# EAGLE board STorM32 NT breakout v10 (EAGLE 6.5.0)
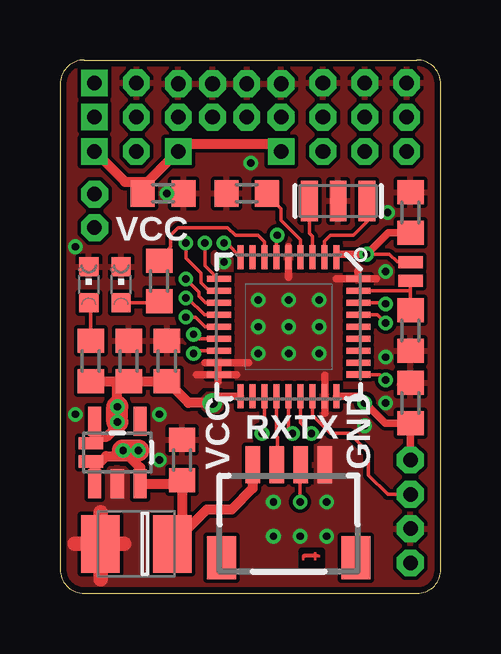
[diagram p0: board, top side]
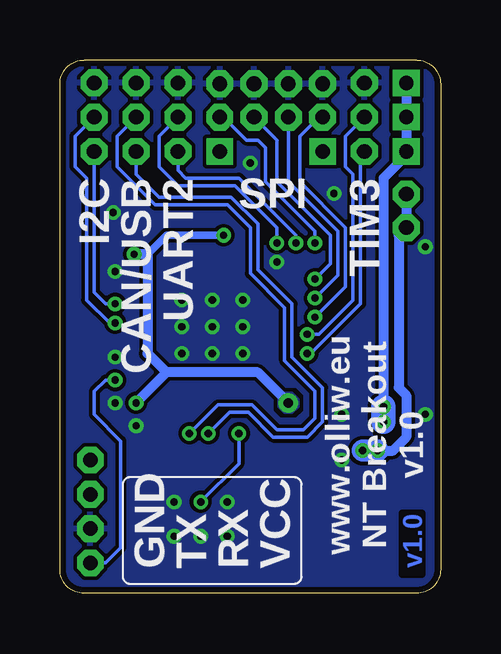
[diagram p1: board, bottom side, seen from below]

Size 15.88 x 22.23 mm. Coordinates in mm from the lower left corner, seen from the top.
Outline: 1,22.23 14.88,22.23 arc-90 15.88,21.23 15.88,1 arc-90 14.88,0 1,0 arc-90 0,1 0,21.23 arc-90 1,22.23
Copper layers (1*16): Top 0.035mm / dielectric 1.5mm / Bottom 0.035mm
Design rules "Fusion_eagle_rule_v1.1-shapes-supply-changed": minimum track width 6mil, minimum drill 12mil, track to track 6mil, track to pad 6mil, pad to pad 6mil, via to via 6mil, smd to smd 0mil, copper to edge 10mil, drill to drill 10mil, minimum pad ring 10mil, minimum via ring 6mil, stop-mask expansion 2mil, vias tented up to drill 100mil, thermal gap 6mil

## Footprints (pad centres in the part's own frame; a part is rotated, then mirrored left to right if it is on the bottom)
SMC_B = smd 1.6 x 2.4: + -1.5,0; - 1.5,0
C0603 = smd 1 x 1.1: 1 -0.85,0; 2 0.85,0
SOT23-5 = smd 0.55 x 1.2: 1 -0.95,-1.3; 2 0,-1.3; 3 0.95,-1.3; 4 0.95,1.3; 5 -0.95,1.3
4X1_1P27_OCT_BILEX = drill 0.61 pad 1.118 octagon: 1 0,0; 2 0,-1.429; 3 0,-2.857; 4 0,-4.286
1X1_1P27_QUAD_1.0X0.6 = drill 0.6 pad 1.016 square: 1 0,0
2X1_1P27_OCT_BILEX = drill 0.61 pad 1.118 octagon: 1 0,0; 2 0,-1.397
3X1_1P27_OCT_BILEX = drill 0.61 pad 1.118 octagon: 1 0,0; 2 0,-1.429; 3 0,-2.857
CHIPLED_0603 = smd 0.8 x 0.8: A 0,-0.75; C 0,0.75
SM04B-SRSS-TB = smd 0.6 x 1.55: 1 -1.5,2.975; 2 -0.5,2.975; 3 0.5,2.975; 4 1.5,2.975 | smd 1.2 x 1.8: FIT@1 -2.8,-0.9; FIT@2 2.8,-0.9
R0603 = smd 1 x 1.1: 1 -0.85,0; 2 0.85,0
SJ_2S-NO = smd 0.508 x 1.016: 1 -0.381,0; 2 0.381,0
VFQFPN36 = smd 1 x 0.25: 1 -2.9,2; 2 -2.9,1.5; 3 -2.9,1; 4 -2.9,0.5; 5 -2.9,0; 6 -2.9,-0.5; 7 -2.9,-1; 8 -2.9,-1.5; 9 -2.9,-2; 19 2.9,-2; 20 2.9,-1.5; 21 2.9,-1; 22 2.9,-0.5; 23 2.9,0; 24 2.9,0.5; 25 2.9,1; 26 2.9,1.5; 27 2.9,2 | smd 0.25 x 1: 10 -2,-2.9; 11 -1.5,-2.9; 12 -1,-2.9; 13 -0.5,-2.9; 14 0,-2.9; 15 0.5,-2.9; 16 1,-2.9; 17 1.5,-2.9; 18 2,-2.9; 29 1.5,2.9; 30 1,2.9; 31 0.5,2.9; 32 0,2.9; 33 -0.5,2.9; 34 -1,2.9; 35 -1.5,2.9; 36 -2,2.9 | smd 0.27 x 1: 28 2,2.9
RESONATOR-SMD = smd 0.7 x 1.7: 1 -1.2,0; 2 0,0; 3 1.2,0

## Placement (x,y rotation side)
C1  10u/6.3V  [SMC_B]  3.17,2.06 180 top
C2  100n  [C0603]  5.08,5.56 90 top
C3  100n  [C0603]  4.29,16.67 0 top
C7  1u  [C0603]  2.86,9.68 90 top
C8  100n  [C0603]  7.78,16.67 180 top
C9  100n  [C0603]  14.61,7.94 90 top
C10  100n  [C0603]  4.45,9.68 90 top
C11  100n  [C0603]  14.61,15.88 90 top
IC2  [SOT23-5]  2.38,5.87 0 top
JP1  SPI  [4X1_1P27_OCT_BILEX]  4.92,21.23 90 top
JP2  SWD  [4X1_1P27_OCT_BILEX]  14.61,5.56 0 top
JP3  SPI  [4X1_1P27_OCT_BILEX]  4.92,19.84 90 top
JP4  3V  [1X1_1P27_QUAD_1.0X0.6]  4.92,18.41 0 top
JP5  3V  [1X1_1P27_QUAD_1.0X0.6]  9.21,18.41 0 top
JP6  3V  [1X1_1P27_QUAD_1.0X0.6]  1.43,18.41 0 top
JP7  VCC  [2X1_1P27_OCT_BILEX]  1.43,15.24 180 top
JP8  3V  [1X1_1P27_QUAD_1.0X0.6]  1.43,19.84 0 top
JP9  UART2  [3X1_1P27_OCT_BILEX]  10.95,18.41 180 top
JP10  CAN/USB  [3X1_1P27_OCT_BILEX]  12.7,18.41 180 top
JP11  I2C  [3X1_1P27_OCT_BILEX]  14.45,18.41 180 top
JP12  TIM  [3X1_1P27_OCT_BILEX]  3.17,18.41 180 top
JP13  3V  [1X1_1P27_QUAD_1.0X0.6]  1.43,21.27 0 top
LED1  red  [CHIPLED_0603]  1.19,12.86 0 top
LED2  green  [CHIPLED_0603]  2.54,12.86 0 top
NTX  NTX  [SM04B-SRSS-TB]  9.53,2.38 0 top
R1  4.7k  [R0603]  1.27,9.68 90 top
R6  2.2k  [R0603]  4.13,13.02 270 top
R7  10k  [R0603]  14.61,10.95 90 top
SJ1  POWER  [SJ_2S-NO]  1.27,5.87 90 top
SJ2  BOOT0  [SJ_2S-NO]  14.61,13.41 270 top
U1  STM32F10XTXU6  [VFQFPN36]  9.53,11.11 270 top
Y1  RESONATORSMD  [RESONATOR-SMD]  11.59,16.35 180 top

## Library data of the parts
C1-C3 C7-C11 R1 R6 R7 = rcl
IC2 SJ1 SJ2 Y1 = # SparkFun2
JP1-JP13 = # stdlib
LED1 LED2 = led
NTX = con-jst2
U1 = # stm32

## Nets
3.3V: C3.1 C7.1 C9.1 C10.1 C11.1 IC2.5 JP2.1 JP4.1 JP5.1 JP6.1 JP8.1 JP13.1 R1.1 SJ1.2 SJ2.1 U1.1 U1.6 U1.19 U1.27
5V: C1.+ C2.1 IC2.1 IC2.3 JP7.1 JP7.2 NTX.1 SJ1.1
CANRX: JP10.1 U1.23
CANTX: JP10.2 U1.24
CS: JP3.4 U1.11
GND: C1.- C2.2 C3.2 C7.2 C8.2 C9.2 C10.2 C11.2 IC2.2 JP1.1 JP1.2 JP1.3 JP1.4 JP2.3 JP9.3 JP10.3 JP11.3 JP12.3 LED1.C LED2.C NTX.4 R7.1 U1.5 U1.17 U1.18 U1.26 U1.36 Y1.2
LED: R6.1 U1.7
N$1: C8.1 U1.4
N$2: LED2.A R6.2
N$3: R7.2 SJ2.2 U1.35
N$5: U1.2 Y1.1
N$6: U1.3 Y1.3
N$9: LED1.A R1.2
RX: NTX.2 U1.22
RX2: JP9.1 U1.10
SCK: JP3.3 U1.12
SCL: JP11.2 U1.33
SDA: JP11.1 U1.34
SDI: JP3.1 U1.14
SDO: JP3.2 U1.13
SWCLK: JP2.4 U1.28
SWDIO: JP2.2 U1.25
T11: U1.20
T33: JP12.2 U1.15
T34: JP12.1 U1.16
TX: NTX.3 U1.21
TX2: JP9.2 U1.9

## Tracks (layer width: path | path; a pad name or v marks a point on that pad's centre or on a via)
3.3V  (via drill 0.3, 0.4 pad 0.81)
  Top 0.152: 1.59,6.58 1.43,6.51 IC2.5 1.46,7.14 | 11.57,13.97 U1.1 11.53,14.13 | 14.47,15.03 C11.1 | U1.6 9.03,14.9 v9.05,14.92 | SJ2.1 14.59,13.81 14.05,13.81 13.73,14.13 v12.78,14.13 | C3.1 3.49,16.73 3.49,17.14
  Top 0.305: U1.27 12.43,8.21 v12.7,7.94 13.55,7.09 C9.1 JP2.1 | U1.19 6.62,8.21 v6.35,7.94 | 11.53,14.13 v12.78,14.13 13.68,15.03 C11.1
  Top 0.406: 1.59,6.58 SJ1.2 | R1.1 2.38,8.83 | 1.43,6.51 1.91,6.51 2.38,6.99 v2.38,7.14 | v2.38,7.78 2.38,8.83 | v6.35,7.94 5.34,7.94 C10.1 C7.1 2.38,8.83 | JP5.1 8.89,18.73 5.24,18.73 JP4.1 3.65,17.14 3.49,17.14 2.7,17.14 JP6.1
  Top 0.914: v2.38,7.14 v2.38,7.78
  Bottom 0.305: 12.22,14.13 11.43,14.92 v9.05,14.92
  Bottom 0.406: v6.35,7.94 7.62,9.21 11.43,9.21 | v12.78,14.13 12.22,14.13 12.22,10 11.43,9.21 | v2.38,7.78 2.38,17.3 1.43,18.26 JP6.1 JP8.1 JP13.1 | 11.43,9.21 v12.7,7.94
  Bottom 1.016: v2.38,7.14 v2.38,7.78
  pour Top: 5.95,7.7 5.95,8.18 6.11,8.33 6.59,8.33 6.75,8.18 6.75,7.7 6.59,7.54 6.11,7.54
  pour Bottom: 6.19,8.33 6.59,8.33 6.75,8.18 6.75,7.78 6.51,7.54 6.19,7.54 5.95,7.78 5.95,8.1
5V  (via drill 0.3)
  Top 0.152: IC2.3 | SJ1.1 1.5,5.49 1.43,5.24 | 6.1,3.49 5.87,3.33 | 5.08,2.47 C1.+ | 4.95,4.57 C2.1 | 1.91,5.71 2.38,5.71 v2.62,5.95
  Top 0.406: NTX.1 8.03,4.37 7.14,3.49 6.1,3.49 C1.+ | IC2.1 1.43,5.24 1.91,5.71 2.86,5.71 3.33,5.24 IC2.3 | IC2.3 4.95,4.57 | C2.1 5.08,2.47
  Top 0.914: v3.25,5.95 v2.62,5.95
  Bottom 0.406: JP7.2 JP7.1 1.75,14.92 1.75,8.57 1.43,8.26 1.43,6.51 1.98,5.95 v2.62,5.95
  Bottom 0.914: v2.62,5.95 v3.25,5.95
CANRX  (via drill 0.3)
  Top 0.152: U1.23 9.53,6.83 v9.68,6.67
  Bottom 0.152: v9.68,6.67 8.81,7.54 8.02,7.54 6.99,6.51 5.56,6.51 4.92,7.14 4.92,8.57 6.19,9.84 6.19,12.06 7.62,13.49 7.62,15.4 8.73,16.51 11.75,16.51 12.7,17.46 JP10.1
CANTX  (via drill 0.3)
  Top 0.152: U1.24 10.03,7.12 v10.48,6.67
  Bottom 0.152: v10.48,6.67 9.29,7.86 7.86,7.86 6.83,6.83 5.71,6.83 5.24,7.3 5.24,8.41 6.51,9.68 6.51,11.91 7.94,13.34 7.94,15.24 8.89,16.19 11.91,16.19 13.49,17.78 13.49,19.05 JP10.2
CS  (via drill 0.3)
  Top 0.152: U1.11 6.2,12.61 5.87,12.94 5.87,13.34 5.24,13.97 v5.24,14.61
  Bottom 0.152: v5.24,14.61 5.24,15.08 7.3,17.14 7.3,18.57 7.62,18.89 8.1,18.89 9.05,19.84 JP3.4
GND  (via drill 0.3 pad 0.61)
  Top 0.152: U1.17 6.62,9.48 6.59,9.45 | 12.42,13.18 12.58,13.17 U1.36
  Top 0.305: 9.53,14.45 9.53,13.18 | 13.18,13.11 11.51,13.11 | 6.04,9.6 7.86,9.6 | 5.67,9.12 7.34,9.12 | 12.42,13.18 12.42,13.45 | 6.59,8.81 6.59,9.45 | 11.04,7.5 11.04,9.09
  Top 0.61: 1.68,0.59 1.68,3.37 | 2.66,2.08 0.59,2.08
  other vias: 10.79,11.11 10.79,12.22 8.26,10 9.53,10 10.79,10 11.11,3.81 8.89,3.81 12.7,6.99 13.57,7.94 13.57,9.84 4.13,5.56 4.13,7.46 8.89,2.38 11.11,2.38 10,2.38 8.26,12.22 8.26,11.11 9.53,11.11 9.53,12.22 6.83,13.81 7.94,17.94 4.45,16.67 13.57,13.41 0.64,7.46 0.64,14.45 13.65,15.88
  pour Bottom (isolate 0.152, rank 2): 0.33,21.29 arc-90 1,21.96 14.95,21.96 arc-90 15.62,21.29 15.62,1 arc-90 14.95,0.33 1,0.33 arc-90 0.33,1
  pour Top (isolate 0.152, rank 2): 0.33,21.29 arc-90 1,21.96 14.95,21.96 arc-90 15.62,21.29 15.62,1 arc-90 14.95,0.33 1,0.33 arc-90 0.33,1
  pour Top (no thermals): 10.64,6.35 11.59,6.35 11.59,4.13 10.64,4.13
  pour Top (no thermals): 1.91,3.81 1.91,5.08 2.06,5.24 2.7,5.24 2.86,5.08 2.86,3.81
LED
  Top 0.152: U1.7 8.53,14.65 8.26,14.92 7.3,14.92 6.99,15.24 4.92,15.24 4.6,14.92 4.6,14.45 R6.1
N$1
  Top 0.152: U1.4 10.03,14.74 9.21,15.56 9.21,16.03 8.73,16.51 C8.1
N$2
  Top 0.152: LED2.A 4.03,12.11 R6.2
N$3
  Top 0.152: U1.35 14.61,12.61 SJ2.2 R7.2
N$5
  Top 0.152: U1.2 11.03,14.68 11.27,14.92 12.22,14.92 12.79,15.49 Y1.1
N$6
  Top 0.152: U1.3 10.53,14.88 10.39,15.01 Y1.3
N$9
  Top 0.152: R1.2 1.27,12.19 LED1.A
RX
  Top 0.152: 9.21,5.22 NTX.2 9.05,5.54 9.05,6.51 9.03,6.53 U1.22
RX2  (via drill 0.3)
  Top 0.152: v6.03,14.61 6.03,13.65 6.57,13.11 U1.10
  Bottom 0.152: JP9.1 10.95,17.62 10.64,17.3 8.41,17.3 6.03,14.92 v6.03,14.61
SCK  (via drill 0.3)
  Top 0.152: v5.24,13.1 5.79,12.54 5.79,12.38 6.06,12.11 U1.12
  Bottom 0.152: JP3.3 6.83,18.89 6.83,17.14 4.6,14.92 4.6,13.73 v5.24,13.1
SCL  (via drill 0.3)
  Top 0.152: U1.33 13.23,11.61 v13.57,11.27
  Bottom 0.152: v13.57,11.27 13.81,11.27 14.76,12.22 14.76,17.3 15.24,17.78 15.24,19.05 JP11.2
SDA  (via drill 0.3)
  Top 0.152: U1.34 13.53,12.11 v13.57,12.06
  Bottom 0.152: JP11.1 14.45,12.54 13.97,12.06 v13.57,12.06
SDI  (via drill 0.3)
  Top 0.152: U1.14 6.03,11.11 5.64,11.51 v5.24,11.51
  Bottom 0.152: JP3.1 5.08,19.84 5.87,19.05 5.87,17.14 3.97,15.24 3.97,12.78 v5.24,11.51
SDO  (via drill 0.3)
  Top 0.152: v5.24,12.3 5.32,12.3 6.01,11.61 U1.13
  Bottom 0.152: JP3.2 6.35,17.14 4.29,15.08 4.29,13.26 v5.24,12.3
SWCLK  (via drill 0.3)
  Top 0.152: U1.28 13.32,9.11 v13.57,8.89
  Bottom 0.152: v13.57,8.89 13.97,8.89 14.45,8.41 14.45,7.46 13.34,6.35 13.34,1.91 13.97,1.27 JP2.4
SWDIO
  Top 0.152: U1.25 10.53,7.41 11.27,6.67 12.06,6.67 12.86,5.87 12.86,4.92 13.65,4.13 JP2.2
T33  (via drill 0.3)
  Top 0.152: U1.15 5.74,10.61 v5.56,10.79
  Bottom 0.152: v5.56,10.79 5.08,10.79 3.65,12.22 3.65,17.46 3.97,17.78 3.97,19.05 JP12.2
T34  (via drill 0.3)
  Top 0.152: U1.16 5.67,10.11 v5.56,10
  Bottom 0.152: JP12.1 3.33,18.26 3.33,12.06 5.4,10 v5.56,10
TX  (via drill 0.3)
  Top 0.152: U1.21 8.53,6.78 v8.41,6.67 | NTX.3 10,5.33 v10,3.81
  Bottom 0.152: v8.41,6.67 8.41,5.4 v10,3.81
TX2  (via drill 0.3)
  Top 0.152: U1.9 6.93,14.61 v6.83,14.61
  Bottom 0.152: v6.83,14.61 6.83,15.24 8.57,16.99 10.95,16.99 11.75,17.78 11.75,19.05 JP9.2

## Text on the board
Top: t
Bottom: v1.0
tNames: VCC | RX | TX | VCC | GND
bNames: TIM3 | SPI | UART2 | CAN/USB | I2C | www.olliw.eu / NT Breakout / v1.0 | VCC | RX | TX | GND